# Altium PCB Controller_PCB.PcbDoc
Units mil, origin at the board's own origin, x right, y up, seen from the top; angles counter-clockwise.
Board outline 4500 x 2600 mil, 2 copper layers (Top Layer, Bottom Layer), stack 60.4 mil thick; 69 components, 76 nets, 1123 pads, 0 vias.
Unrouted connection lines stored in the file: 149.
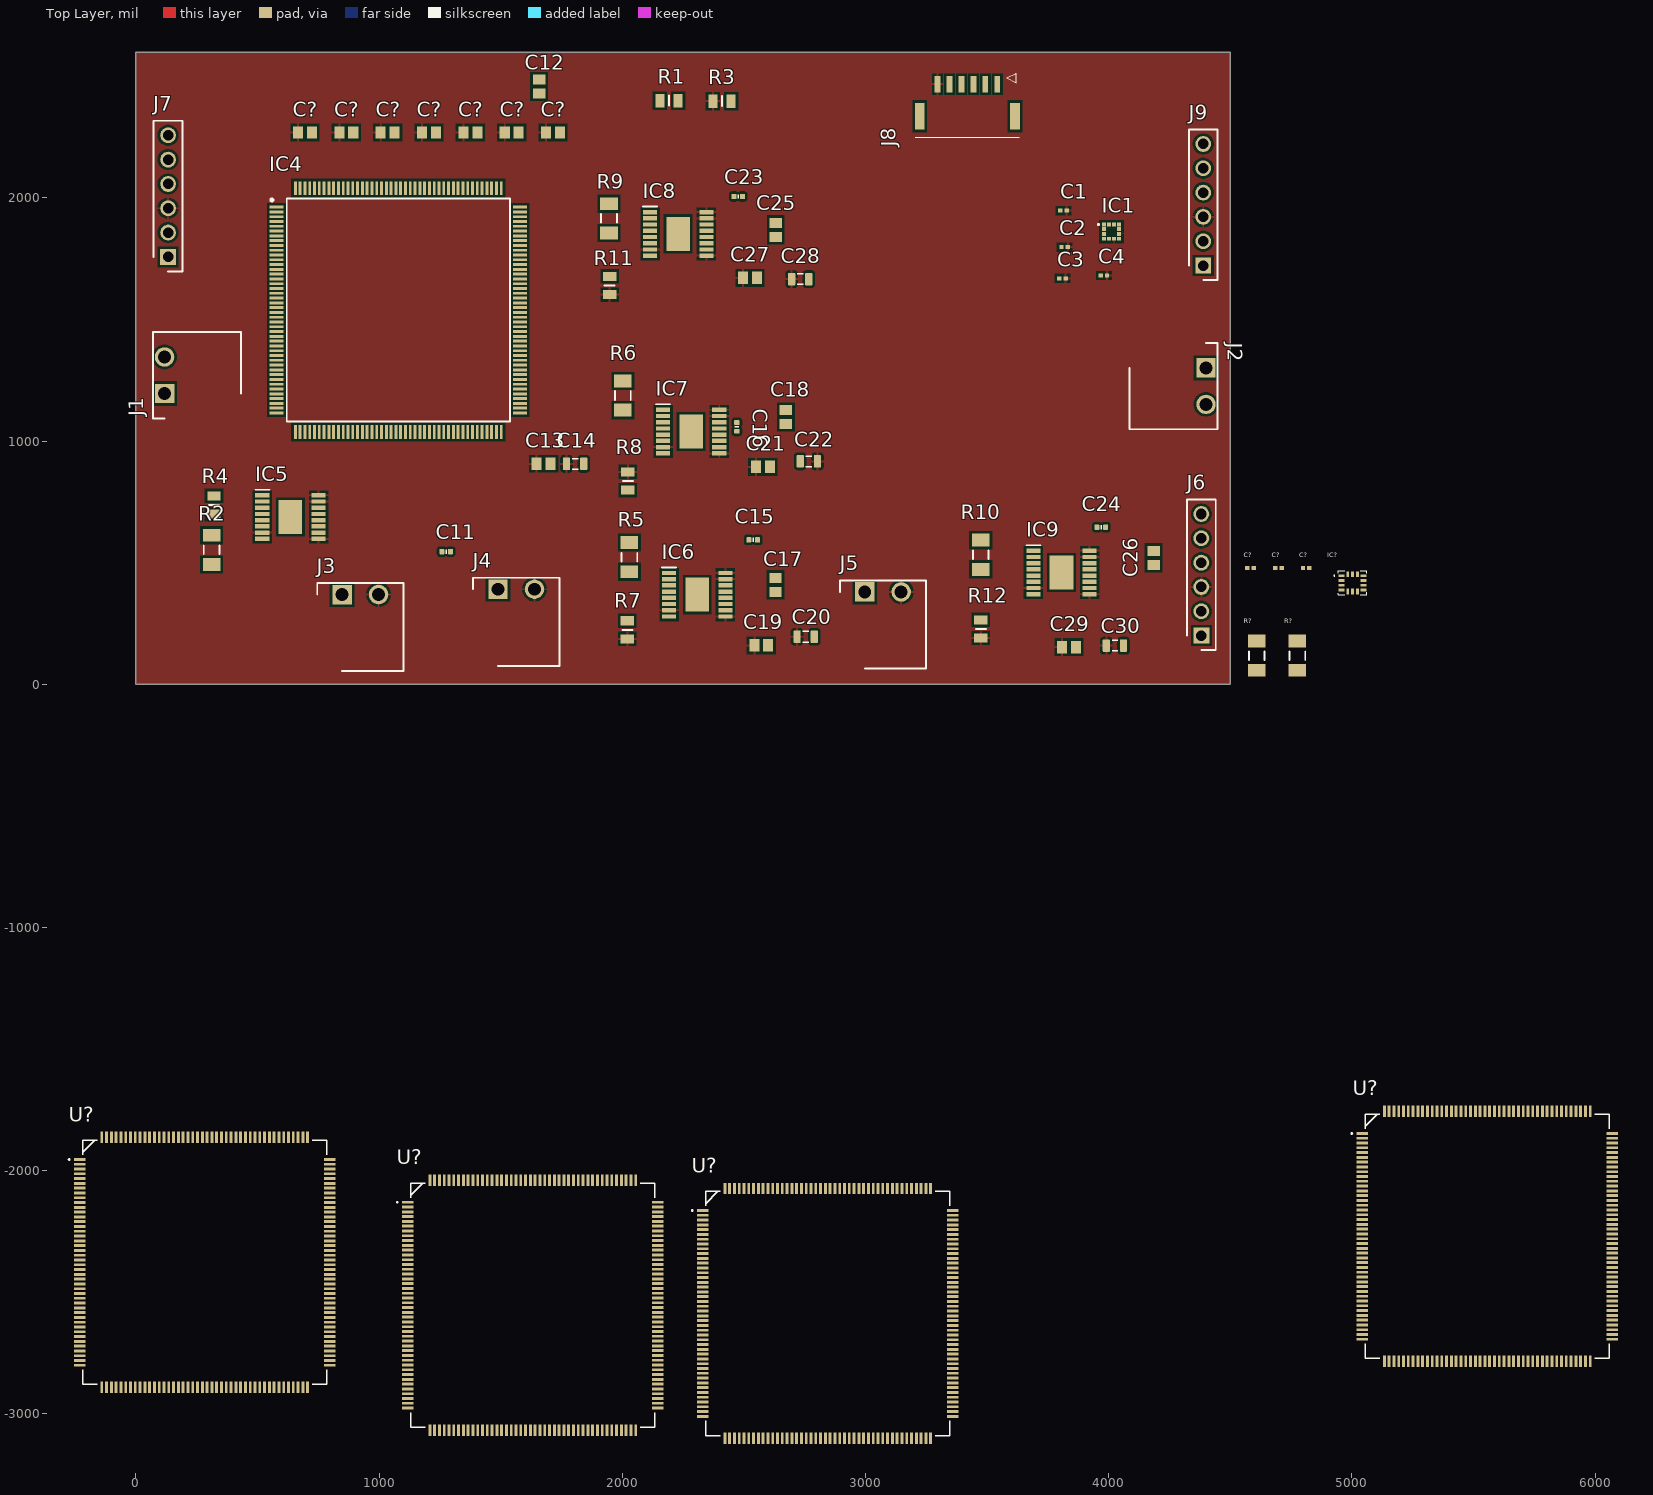
[diagram p0: Top Layer view]
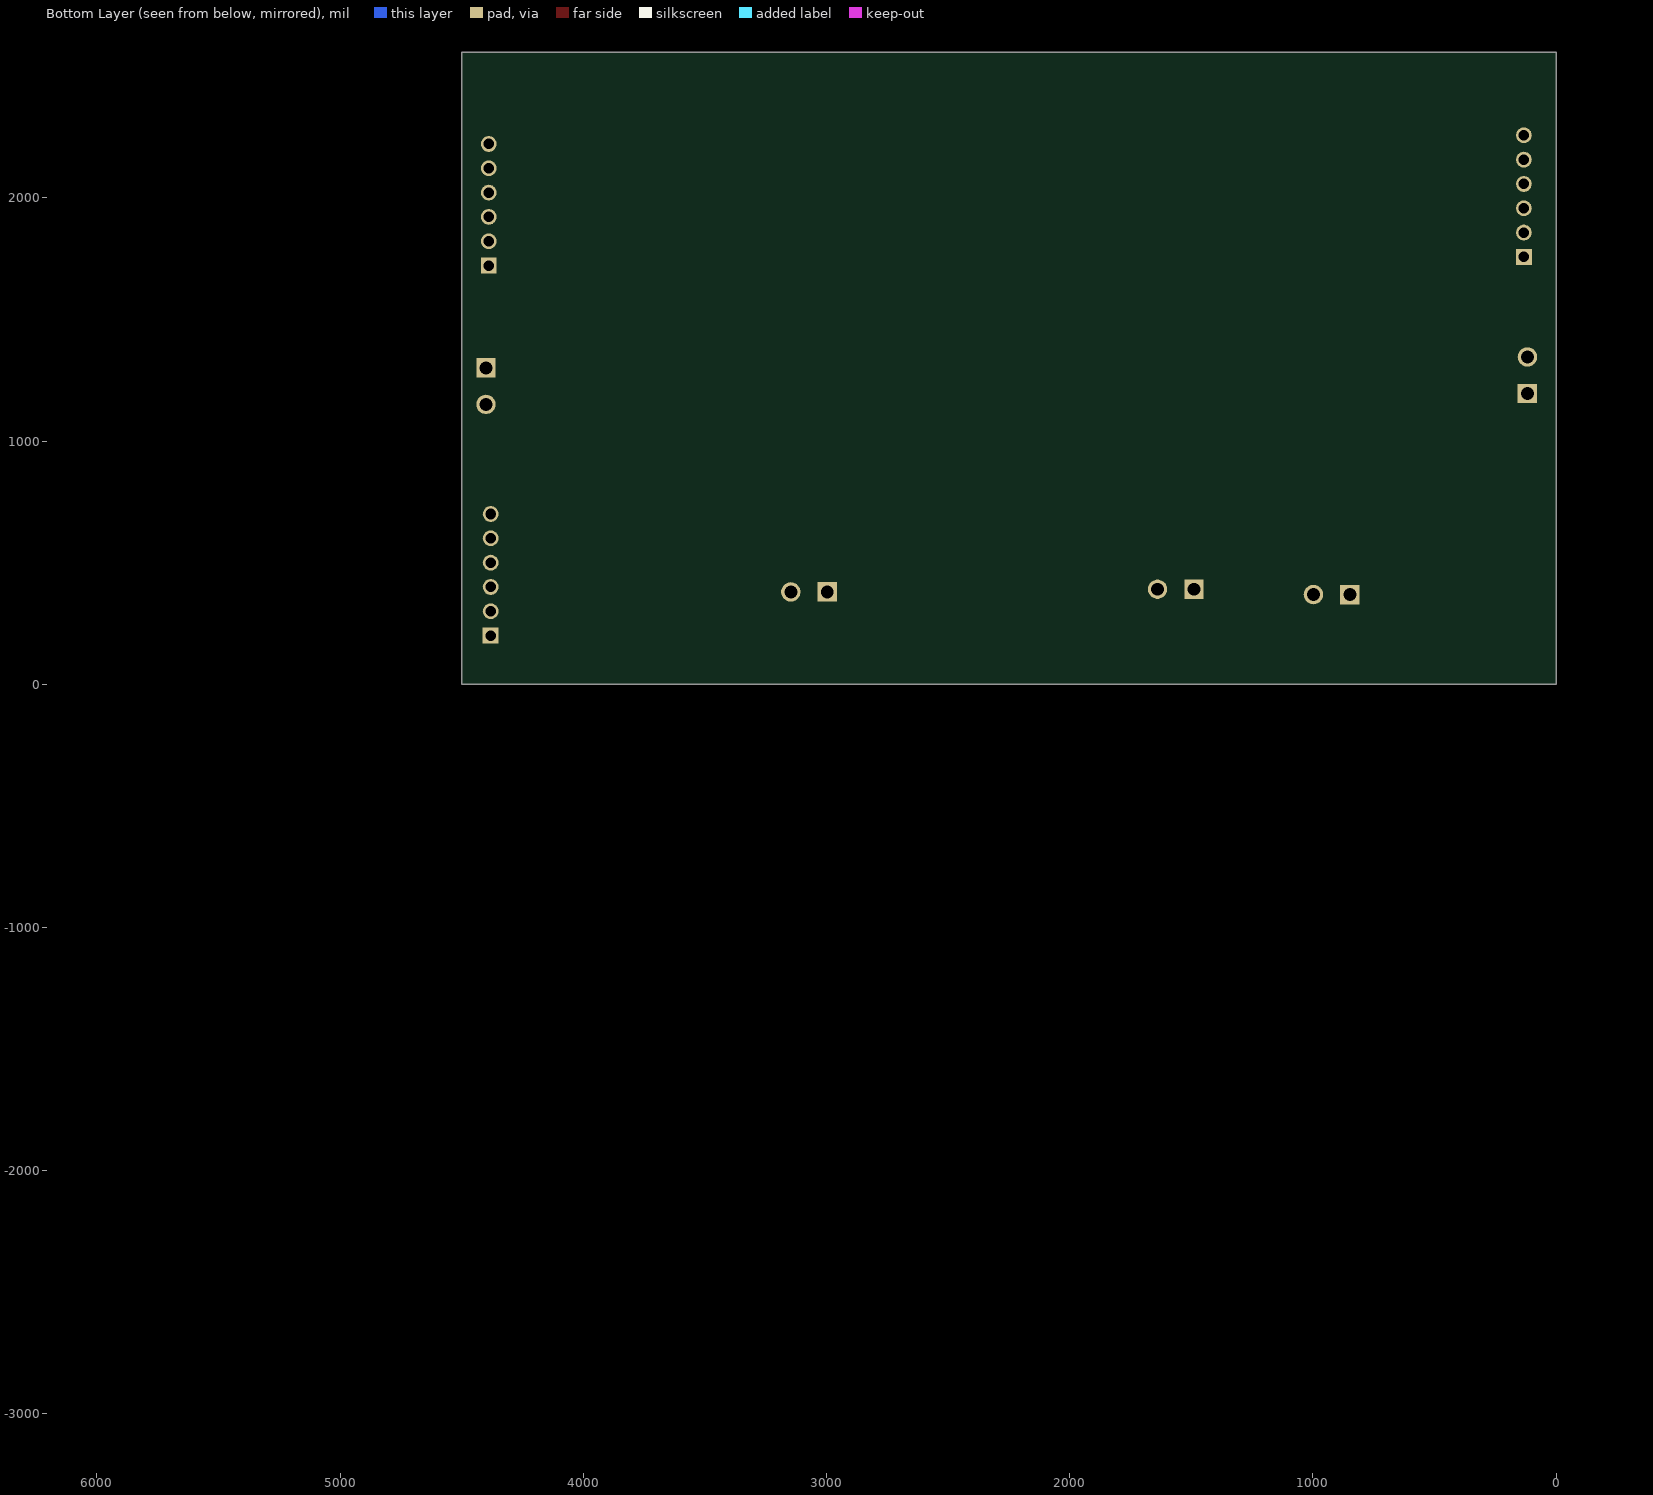
[diagram p1: Bottom Layer view, seen from below]

## Layer stack, top to bottom
Top Solder: solder mask 0.5, Solder Resist, Dk 3.3
Top Layer: signal copper 0.7
Dielectric1: core 59, FR-4, Dk 4.3
Bottom Layer: signal copper 0.7
Bottom Solder: solder mask 0.5, Solder Resist, Dk 3.3

## Board outline
0,0 4500,0 4500,2600 0,2600

## Design rules (kind name [scope] priority, off if disabled: settings)
Clearance [All] p1: gap=10 ignorepadtopadclearanceinfootprint=FALSE
HoleSize [All] p1: absolutevalues=TRUE maxlimit=300 minlimit=10 maxpercent=80.000 minpercent=20.000
MinimumAnnularRing [All] p1: minimumring=10
PasteMaskExpansion [All] p1: expansion=10
PlaneClearance [All] p1: clearance=15
PlaneConnect [All] p1: pad.planeconnectstyle=Relief pad.reliefexpansion=20 pad.reliefentries=4 pad.reliefconductorwidth=10 pad.reliefairgap=10 via.planeconnectstyle=Direct via.reliefexpansion=20 via.reliefentries=4 via.reliefconductorwidth=10 via.reliefairgap=10
PolygonConnect [All] p1: connectstyle=Relief reliefconductorwidth=10 reliefentries=4 polygonreliefangle="90 Angle" airgapwidth=10
RoomDefinition Controller [InComponentClass('Controller')] p1: confinementstyle=ConfineIn formatcopy=TRUE lockcomponents=FALSE outline 3165,1489.31 3296,1489.31 3296,1637.31 3165,1637.31
RoutingVias [All] p1: holewidth=28 width=50 viastyle="Through Hole" minholewidth=28 minwidth=50 maxholewidth=28 maxwidth=50
SMDNeckDown [All] p1: percent=100.000
SilkToSolderMaskClearance SilkscreenOverComponentPads [IsPad] p1: minsilkscreentomaskgap=10 clearancetoexposedcopper=TRUE
SolderMaskExpansion [All] p1: expansion=10 istentingtop=FALSE
SupplyNets "Schematic Supply Nets_7" [InNet('5V')] p1: voltage=0.000
SupplyNets "Schematic Supply Nets_6" [InNet('1V8')] p2: voltage=0.000
SupplyNets "Schematic Supply Nets_5" [InNet('VREF')] p3: voltage=0.000
SupplyNets "Schematic Supply Nets_4" [InNet('12V')] p4: voltage=0.000
SupplyNets "Schematic Supply Nets_3" [InNet('3V3')] p5: voltage=0.000
SupplyNets "Schematic Supply Nets_2" [InNet('1.8V')] p6: voltage=0.000
SupplyNets "Schematic Supply Nets_1" [InNet('GND')] p7: voltage=0.000
SupplyNets "Schematic Supply Nets" [InNet('3.3V')] p8: voltage=0.000
Width [All] p1: maxlimit=10 minlimit=10 preferedwidth=10
25 further rules are at their usual default settings.

## Classes and differential pairs
component class IMU_sensors: C1 C2 C3 C4 C? IC1 IC?
component class Motor_Drivers: C11 C12 C13 C14 C15 C16 C17 C18 C19 C20 C21 C22 C23 C24 C25 C26 C27 C28 C29 C30 IC5 IC6 IC7 IC8 IC9 R1 R2 R3 R4 R5 R6 R7 R8 R9 R10 R11 R12
component class connectors(temp): J1 J2 J3 J4 J5 J6 J7 J8 J9
component class Controller: C? IC4 R? U?

## Components (designator, comment, footprint, x,y, rotation, side; value= is the part's Value field where it differs from the comment)
C1 "02013A0R5CAT2A" CAPC0603X33N 3814.24,1947.99 r0 top
C2 "02013A0R5CAT2A" CAPC0603X33N 3819.24,1797.99 r0 top
C3 "02013A0R5CAT2A" CAPC0603X33N 3810.24,1668.99 r0 top
C4 "02013A0R5CAT2A" CAPC0603X33N 3980.24,1681.27 r0 top
C11 "Capacitor 22nF +/-20% 10V 0402" CAPC0402(1005)60_L 1275.95,545.53 r0 top value=22nF
C12 "Capacitor 100 nF +/-10% 50 V 0805" CAPC2013X95X50LL10T25 1658.11,2458.39 r270 top value=100nF
C13 "Capacitor 100 nF +/-10% 50 V 0805" CAPC2013X95X50LL10T25 1676.58,906.8 r0 top value=100nF
C14 "Capacitor 10µF +/-20% 25V 0805" CAPC0805(2012)145_L 1806.19,906.8 r0 top value=10µF
C15 "Capacitor 22nF +/-20% 10V 0402" CAPC0402(1005)60_L 2538.48,594 r0 top value=22nF
C16 "Capacitor 22nF +/-20% 10V 0402" CAPC0402(1005)60_L 2471.28,1058.51 r270 top value=22nF
C17 "Capacitor 100 nF +/-10% 50 V 0805" CAPC2013X95X50LL10T25 2630.04,408.87 r90 top value=100nF
C18 "Capacitor 100 nF +/-10% 50 V 0805" CAPC2013X95X50LL10T25 2672.88,1098.98 r90 top value=100nF
C19 "Capacitor 100 nF +/-10% 50 V 0805" CAPC2013X95X50LL10T25 2571.46,160 r0 top value=100nF
C20 "Capacitor 10µF +/-20% 25V 0805" CAPC0805(2012)145_L 2754.21,195.59 r0 top value=10µF
C21 "Capacitor 100 nF +/-10% 50 V 0805" CAPC2013X95X50LL10T25 2578.24,894.11 r0 top value=100nF
C22 "Capacitor 10µF +/-20% 25V 0805" CAPC0805(2012)145_L 2766.97,917.1 r180 top value=10µF
C23 "Capacitor 22nF +/-20% 10V 0402" CAPC0402(1005)60_L 2476.75,2005.84 r0 top value=22nF
C24 "Capacitor 22nF +/-20% 10V 0402" CAPC0402(1005)60_L 3969.77,645.98 r0 top value=22nF
C25 "Capacitor 100 nF +/-10% 50 V 0805" CAPC2013X95X50LL10T25 2631.39,1868.72 r90 top value=100nF
C26 "Capacitor 100 nF +/-10% 50 V 0805" CAPC2013X95X50LL10T25 4185,520 r90 top value=100nF
C27 "Capacitor 100 nF +/-10% 50 V 0805" CAPC2013X95X50LL10T25 2525.09,1671.2 r0 top value=100nF
C28 "Capacitor 10µF +/-20% 25V 0805" CAPC0805(2012)145_L 2731.93,1666.2 r0 top value=10µF
C29 "Capacitor 100 nF +/-10% 50 V 0805" CAPC2013X95X50LL10T25 3837,153 r0 top value=100nF
C30 "Capacitor 10µF +/-20% 25V 0805" CAPC0805(2012)145_L 4026,159 r0 top value=10µF
C? "02013A0R5CAT2A" CAPC0603X33N 4698,479 r0 top
C? "02013A0R5CAT2A" CAPC0603X33N 4812,479 r0 top
C? "02013A0R5CAT2A" CAPC0603X33N 4583,479 r0 top
C? "Capacitor 100 nF +/-10% 50 V 0805" CAPC2013X95X50LL10T25 1375.31,2269.16 r0 top value=100nF
C? "Capacitor 100 nF +/-10% 50 V 0805" CAPC2013X95X50LL10T25 865.31,2269.16 r0 top value=100nF
C? "Capacitor 100 nF +/-10% 50 V 0805" CAPC2013X95X50LL10T25 1205.31,2269.16 r0 top value=100nF
C? "Capacitor 100 nF +/-10% 50 V 0805" CAPC2013X95X50LL10T25 1715.31,2269.16 r0 top value=100nF
C? "Capacitor 100 nF +/-10% 50 V 0805" CAPC2013X95X50LL10T25 1035.31,2269.16 r0 top value=100nF
C? "Capacitor 100 nF +/-10% 50 V 0805" CAPC2013X95X50LL10T25 1545.31,2269.16 r0 top value=100nF
C? "Capacitor 100 nF +/-10% 50 V 0805" CAPC2013X95X50LL10T25 695.31,2269.16 r0 top value=100nF
IC1 "LSM303AGRTR" LGA-12 4011.74,1861.83 r0 top
IC4 "STM32H757IIT6" QFP50P2600X2600X160-176N 1079,1539 r0 top
IC5 "DRV8874PWPR" SOP65P640X120-17N 635.43,687.83 r0 top
IC6 "DRV8874PWPR" SOP65P640X120-17N 2308.47,368.44 r0 top
IC7 "DRV8874PWPR" SOP65P640X120-17N 2283.22,1039.36 r0 top
IC8 "DRV8874PWPR" SOP65P640X120-17N 2230,1852.14 r0 top
IC9 "DRV8874PWPR" SOP65P640X120-17N 3806.2,459.79 r0 top
IC? "ICM-42670-P" ICM42670P 5003,417 r0 top
J1 "5444262" SHDR2W80P0X381_1X2_901X920X740P 118,1196 r90 top
J2 "5444262" SHDR2W80P0X381_1X2_901X920X740P 4400.48,1301.14 r270 top
J3 "5444262" SHDR2W80P0X381_1X2_901X920X740P 848,369 r0 top
J4 "5444262" SHDR2W80P0X381_1X2_901X920X740P 1489,391 r0 top
J5 "5444262" SHDR2W80P0X381_1X2_901X920X740P 2997,379.9 r0 top
J6 "PH1-06-UA" HDRV6W64P0X254_1X6_1524X250X952P 4381.23,200.31 r90 top
J7 "PH1-06-UA" HDRV6W64P0X254_1X6_1524X250X952P 132.41,1757.56 r90 top
J8 "5023820670" 5023820670 3419.18,2468 r180 top
J9 "PH1-06-UA" HDRV6W64P0X254_1X6_1524X250X952P 4389,1722 r90 top
R1 "RC0805FR-0716KL" RESC2012X60N 2192.19,2400.03 r0 top
R2 "Resistor 10k +/-1% 1206 250 mW" RESC3216X60X45ML15T20 311.41,552.82 r90 top value=10k
R3 "RC0805FR-0751KL" RESC2012X60N 2409.94,2397.98 r0 top
R4 "RC0805FR-075K49L" RESC2012X60N 321.29,737.63 r270 top
R5 "Resistor 10k +/-1% 1206 250 mW" RESC3216X60X45ML15T20 2028.97,523.05 r90 top value=10k
R6 "Resistor 10k +/-1% 1206 250 mW" RESC3216X60X45ML15T20 2002.25,1187.57 r270 top value=10k
R7 "RC0805FR-075K49L" RESC2012X60N 2020.78,224.13 r270 top
R8 "RC0805FR-075K49L" RESC2012X60N 2022.92,835.78 r90 top
R9 "Resistor 10k +/-1% 1206 250 mW" RESC3216X60X45ML15T20 1945.17,1916.12 r270 top value=10k
R10 "Resistor 10k +/-1% 1206 250 mW" RESC3216X60X45ML15T20 3474.2,532.62 r270 top value=10k
R11 "RC0805FR-075K49L" RESC2012X60N 1948.33,1639.7 r270 top
R12 "RC0805FR-075K49L" RESC2012X60N 3474.2,227.79 r270 top
R? "Resistor 10k +/-1% 1206 250 mW" RESC3216X60X45ML15T20 4776,118 r90 top value=10k
R? "Resistor 10k +/-1% 1206 250 mW" RESC3216X60X45ML15T20 4609,118 r90 top value=10k
U? "STM32H757IIT6" LQFP-176 5557,-2270 r0 top
U? "STM32H757IIT6" LQFP-176 283,-2377 r0 top
U? "STM32H757IIT6" LQFP-176 2845,-2587 r0 top
U? "STM32H757IIT6" LQFP-176 1632,-2553 r0 top

## Footprints (in the part's own frame and the unit in brackets; to place one, negate y for a bottom-side part, rotate by r counter-clockwise, add the part's x,y. Pads: shape width x height; smd on the part's side, far side on the other; paste and mask are expansions set on the pad)
5023820670 [mm]
  rect 0.6x1.7 smd: 1(-3.125,0) 2(-1.875,0) 3(-0.625,0) 4(0.625,0) 5(1.875,0) 6(3.125,0)
  rect 1x2.8 smd: 7(-4.975,3.35) 8(4.975,3.35)
  silkscreen extent -5.43,-1.15 5.43,5.53, body extent -5.43,-3.22 5.43,2.73, height 2.2
CAPC0402(1005)60_L [mm] "Chip Capacitor, Body 1.0x0.5mm, Height 0.6mm, IPC High Density"
  rrect25% 0.5x0.55 smd: 1(-0.45,0) 2(0.45,0)
  silkscreen extent 0,-0.2 0,0.2, body extent -0.5,-0.25 0.5,0.25, height 0.6
CAPC0603X33N [mm]
  rect 0.46x0.42 smd: 1(-0.33,0) 2(0.33,0)
  body extent -0.3,-0.15 0.3,0.15, height 0.33
CAPC0805(2012)145_L [mm] "Chip Capacitor, Body 2.0x1.2mm, Height 1.45mm, IPC High Density"
  rrect25% 0.76x1.3 smd: 1(-0.9,0) 2(0.89,0)
  silkscreen extent -0.3,-0.55 0.3,0.55, body extent -1,-0.6 1,0.6, height 1.45
CAPC2013X95X50LL10T25 [mm] "Chip Capacitor, 2-Leads, Body 2.10x1.35mm, IPC High Density"
  rect 1.05x1.3 smd: 1(-0.725,0) 2(0.725,0)
  body extent -1.05,-0.67 1.05,0.67, height 0.95
HDRV6W64P0X254_1X6_1524X250X952P [mm]
  rect 1.65x1.65 hole 1.1: 1(0,0)
  round 1.65 hole 1.1: 2(2.54,0) 3(5.08,0) 4(7.62,0) 5(10.16,0) 6(12.7,0)
  silkscreen extent -1.52,-1.5 14.22,1.5, body extent -1.27,-1.25 13.97,1.25, height 9.52
ICM42670P [mm]
  rect 0.6x0.3 smd: 1(-1.15,0.75) 2(-1.15,0.25) 3(-1.15,-0.25) 4(-1.15,-0.75) 8(1.15,-0.75) 9(1.15,-0.25) 10(1.15,0.25) 11(1.15,0.75)
  rect 0.3x0.6 smd: 5(-0.5,-0.9) 6(0,-0.9) 7(0.5,-0.9) 12(0.5,0.9) 13(0,0.9) 14(-0.5,0.9)
  silkscreen extent -1.95,-1.25 1.5,1.25, body extent -1.5,-1.25 1.5,1.25, height 0.65
LGA-12 [mm]
  rect 0.4x0.4 smd: 1(-0.8,0.75) 2(-0.8,0.25) 3(-0.8,-0.25) 4(-0.8,-0.75) 5(-0.25,-0.75) 6(0.25,-0.75) 7(0.8,-0.75) 8(0.8,-0.25) 9(0.8,0.25) 10(0.8,0.75) 11(0.25,0.75) 12(-0.25,0.75)
  silkscreen extent -1.39,0.72 -1.34,0.77, body extent -1,-1 1,1, height 1
LQFP-176 [mm]
  rect 1.2x0.3 smd paste-0.6 mask-0.597: 1(-13.05,10.75) 2(-13.05,10.25) 3(-13.05,9.75) 4(-13.05,9.25) 5(-13.05,8.75) 6(-13.05,8.25) 7(-13.05,7.75) 8(-13.05,7.25) 9(-13.05,6.75) 10(-13.05,6.25) 11(-13.05,5.75) 12(-13.05,5.25) 13(-13.05,4.75) 14(-13.05,4.25) 15(-13.05,3.75) 16(-13.05,3.25) 17(-13.05,2.75) 18(-13.05,2.25) 19(-13.05,1.75) 20(-13.05,1.25) 21(-13.05,0.75) 22(-13.05,0.25) 23(-13.05,-0.25) 24(-13.05,-0.75) 25(-13.05,-1.25) 26(-13.05,-1.75) 27(-13.05,-2.25) 28(-13.05,-2.75) 29(-13.05,-3.25) 30(-13.05,-3.75) 31(-13.05,-4.25) 32(-13.05,-4.75) 33(-13.05,-5.25) 34(-13.05,-5.75) 35(-13.05,-6.25) 36(-13.05,-6.75) 37(-13.05,-7.25) 38(-13.05,-7.75) 39(-13.05,-8.25) 40(-13.05,-8.75) 41(-13.05,-9.25) 42(-13.05,-9.75) 43(-13.05,-10.25) 44(-13.05,-10.75) 89(13.05,-10.75) 90(13.05,-10.25) 91(13.05,-9.75) 92(13.05,-9.25) 93(13.05,-8.75) 94(13.05,-8.25) 95(13.05,-7.75) 96(13.05,-7.25) 97(13.05,-6.75) 98(13.05,-6.25) 99(13.05,-5.75) 100(13.05,-5.25) 101(13.05,-4.75) 102(13.05,-4.25) 103(13.05,-3.75) 104(13.05,-3.25) 105(13.05,-2.75) 106(13.05,-2.25) 107(13.05,-1.75) 108(13.05,-1.25) 109(13.05,-0.75) 110(13.05,-0.25) 111(13.05,0.25) 112(13.05,0.75) 113(13.05,1.25) 114(13.05,1.75) 115(13.05,2.25) 116(13.05,2.75) 117(13.05,3.25) 118(13.05,3.75) 119(13.05,4.25) 120(13.05,4.75) 121(13.05,5.25) 122(13.05,5.75) 123(13.05,6.25) 124(13.05,6.75) 125(13.05,7.25) 126(13.05,7.75) 127(13.05,8.25) 128(13.05,8.75) 129(13.05,9.25) 130(13.05,9.75) 131(13.05,10.25) 132(13.05,10.75)
  rect 0.3x1.2 smd paste-0.6 mask-0.597: 45(-10.75,-13.05) 46(-10.25,-13.05) 47(-9.75,-13.05) 48(-9.25,-13.05) 49(-8.75,-13.05) 50(-8.25,-13.05) 51(-7.75,-13.05) 52(-7.25,-13.05) 53(-6.75,-13.05) 54(-6.25,-13.05) 55(-5.75,-13.05) 56(-5.25,-13.05) 57(-4.75,-13.05) 58(-4.25,-13.05) 59(-3.75,-13.05) 60(-3.25,-13.05) 61(-2.75,-13.05) 62(-2.25,-13.05) 63(-1.75,-13.05) 64(-1.25,-13.05) 65(-0.75,-13.05) 66(-0.25,-13.05) 67(0.25,-13.05) 68(0.75,-13.05) 69(1.25,-13.05) 70(1.75,-13.05) 71(2.25,-13.05) 72(2.75,-13.05) 73(3.25,-13.05) 74(3.75,-13.05) 75(4.25,-13.05) 76(4.75,-13.05) 77(5.25,-13.05) 78(5.75,-13.05) 79(6.25,-13.05) 80(6.75,-13.05) 81(7.25,-13.05) 82(7.75,-13.05) 83(8.25,-13.05) 84(8.75,-13.05) 85(9.25,-13.05) 86(9.75,-13.05) 87(10.25,-13.05) 88(10.75,-13.05) 133(10.75,13.05) 134(10.25,13.05) 135(9.75,13.05) 136(9.25,13.05) 137(8.75,13.05) 138(8.25,13.05) 139(7.75,13.05) 140(7.25,13.05) 141(6.75,13.05) 142(6.25,13.05) 143(5.75,13.05) 144(5.25,13.05) 145(4.75,13.05) 146(4.25,13.05) 147(3.75,13.05) 148(3.25,13.05) 149(2.75,13.05) 150(2.25,13.05) 151(1.75,13.05) 152(1.25,13.05) 153(0.75,13.05) 154(0.25,13.05) 155(-0.25,13.05) 156(-0.75,13.05) 157(-1.25,13.05) 158(-1.75,13.05) 159(-2.25,13.05) 160(-2.75,13.05) 161(-3.25,13.05) 162(-3.75,13.05) 163(-4.25,13.05) 164(-4.75,13.05) 165(-5.25,13.05) 166(-5.75,13.05) 167(-6.25,13.05) 168(-6.75,13.05) 169(-7.25,13.05) 170(-7.75,13.05) 171(-8.25,13.05) 172(-8.75,13.05) 173(-9.25,13.05) 174(-9.75,13.05) 175(-10.25,13.05) 176(-10.75,13.05)
  silkscreen extent -14.23,-12.75 12.75,12.75, body extent -13.3,-13.3 13.3,13.3, height 1.65
QFP50P2600X2600X160-176N [mm]
  rect 1.45x0.3 smd: 1(-12.725,10.75) 2(-12.725,10.25) 3(-12.725,9.75) 4(-12.725,9.25) 5(-12.725,8.75) 6(-12.725,8.25) 7(-12.725,7.75) 8(-12.725,7.25) 9(-12.725,6.75) 10(-12.725,6.25) 11(-12.725,5.75) 12(-12.725,5.25) 13(-12.725,4.75) 14(-12.725,4.25) 15(-12.725,3.75) 16(-12.725,3.25) 17(-12.725,2.75) 18(-12.725,2.25) 19(-12.725,1.75) 20(-12.725,1.25) 21(-12.725,0.75) 22(-12.725,0.25) 23(-12.725,-0.25) 24(-12.725,-0.75) 25(-12.725,-1.25) 26(-12.725,-1.75) 27(-12.725,-2.25) 28(-12.725,-2.75) 29(-12.725,-3.25) 30(-12.725,-3.75) 31(-12.725,-4.25) 32(-12.725,-4.75) 33(-12.725,-5.25) 34(-12.725,-5.75) 35(-12.725,-6.25) 36(-12.725,-6.75) 37(-12.725,-7.25) 38(-12.725,-7.75) 39(-12.725,-8.25) 40(-12.725,-8.75) 41(-12.725,-9.25) 42(-12.725,-9.75) 43(-12.725,-10.25) 44(-12.725,-10.75) 89(12.725,-10.75) 90(12.725,-10.25) 91(12.725,-9.75) 92(12.725,-9.25) 93(12.725,-8.75) 94(12.725,-8.25) 95(12.725,-7.75) 96(12.725,-7.25) 97(12.725,-6.75) 98(12.725,-6.25) 99(12.725,-5.75) 100(12.725,-5.25) 101(12.725,-4.75) 102(12.725,-4.25) 103(12.725,-3.75) 104(12.725,-3.25) 105(12.725,-2.75) 106(12.725,-2.25) 107(12.725,-1.75) 108(12.725,-1.25) 109(12.725,-0.75) 110(12.725,-0.25) 111(12.725,0.25) 112(12.725,0.75) 113(12.725,1.25) 114(12.725,1.75) 115(12.725,2.25) 116(12.725,2.75) 117(12.725,3.25) 118(12.725,3.75) 119(12.725,4.25) 120(12.725,4.75) 121(12.725,5.25) 122(12.725,5.75) 123(12.725,6.25) 124(12.725,6.75) 125(12.725,7.25) 126(12.725,7.75) 127(12.725,8.25) 128(12.725,8.75) 129(12.725,9.25) 130(12.725,9.75) 131(12.725,10.25) 132(12.725,10.75)
  rect 0.3x1.45 smd: 45(-10.75,-12.725) 46(-10.25,-12.725) 47(-9.75,-12.725) 48(-9.25,-12.725) 49(-8.75,-12.725) 50(-8.25,-12.725) 51(-7.75,-12.725) 52(-7.25,-12.725) 53(-6.75,-12.725) 54(-6.25,-12.725) 55(-5.75,-12.725) 56(-5.25,-12.725) 57(-4.75,-12.725) 58(-4.25,-12.725) 59(-3.75,-12.725) 60(-3.25,-12.725) 61(-2.75,-12.725) 62(-2.25,-12.725) 63(-1.75,-12.725) 64(-1.25,-12.725) 65(-0.75,-12.725) 66(-0.25,-12.725) 67(0.25,-12.725) 68(0.75,-12.725) 69(1.25,-12.725) 70(1.75,-12.725) 71(2.25,-12.725) 72(2.75,-12.725) 73(3.25,-12.725) 74(3.75,-12.725) 75(4.25,-12.725) 76(4.75,-12.725) 77(5.25,-12.725) 78(5.75,-12.725) 79(6.25,-12.725) 80(6.75,-12.725) 81(7.25,-12.725) 82(7.75,-12.725) 83(8.25,-12.725) 84(8.75,-12.725) 85(9.25,-12.725) 86(9.75,-12.725) 87(10.25,-12.725) 88(10.75,-12.725) 133(10.75,12.725) 134(10.25,12.725) 135(9.75,12.725) 136(9.25,12.725) 137(8.75,12.725) 138(8.25,12.725) 139(7.75,12.725) 140(7.25,12.725) 141(6.75,12.725) 142(6.25,12.725) 143(5.75,12.725) 144(5.25,12.725) 145(4.75,12.725) 146(4.25,12.725) 147(3.75,12.725) 148(3.25,12.725) 149(2.75,12.725) 150(2.25,12.725) 151(1.75,12.725) 152(1.25,12.725) 153(0.75,12.725) 154(0.25,12.725) 155(-0.25,12.725) 156(-0.75,12.725) 157(-1.25,12.725) 158(-1.75,12.725) 159(-2.25,12.725) 160(-2.75,12.725) 161(-3.25,12.725) 162(-3.75,12.725) 163(-4.25,12.725) 164(-4.75,12.725) 165(-5.25,12.725) 166(-5.75,12.725) 167(-6.25,12.725) 168(-6.75,12.725) 169(-7.25,12.725) 170(-7.75,12.725) 171(-8.25,12.725) 172(-8.75,12.725) 173(-9.25,12.725) 174(-9.75,12.725) 175(-10.25,12.725) 176(-10.75,12.725)
  silkscreen extent -13.32,-11.65 11.65,11.65, body extent -13,-13 13,13, height 1.6
RESC2012X60N [mm]
  rect 0.95x1.4 smd: 1(-0.95,0) 2(0.95,0)
  silkscreen extent 0,-0.53 0,0.53, body extent -1,-0.63 1,0.63, height 0.6
RESC3216X60X45ML15T20 [mm] "Chip Resistor, 2-Leads, Body 3.3x1.75mm, IPC Low Density"
  rect 1.35x1.85 smd: 1(-1.525,0) 2(1.525,0)
  silkscreen extent -0.45,-0.82 0.45,0.82, body extent -1.65,-0.87 1.65,0.87, height 0.6
SHDR2W80P0X381_1X2_901X920X740P [mm]
  rect 2.025x2.025 hole 1.35: 1(0,0)
  round 2.025 hole 1.35: 2(3.81,0)
  silkscreen extent -2.6,-8 6.41,1.2, body extent -2.71,-8.15 6.52,1.35, height 7.6
SOP65P640X120-17N [mm]
  rect 1.475x0.45 smd: 1(-2.938,2.275) 2(-2.938,1.625) 3(-2.938,0.975) 4(-2.938,0.325) 5(-2.938,-0.325) 6(-2.938,-0.975) 7(-2.938,-1.625) 8(-2.938,-2.275) 9(2.938,-2.275) 10(2.938,-1.625) 11(2.938,-0.975) 12(2.938,-0.325) 13(2.938,0.325) 14(2.938,0.975) 15(2.938,1.625) 16(2.938,2.275)
  rect 2.46x3.55 smd: 17(0,0)
  silkscreen extent -3.67,2.85 -2.2,2.85, body extent -3.2,-2.5 3.2,2.5, height 1.13

## Part data
C1 C2 C3 C4 C? C? C?: "Capacitor", Manufacturer_Name=AVX, Mouser Part Number=581-02013A0R5C, Arrow Part Number=02013A0R5CAT2A, Arrow Price/Stock=https://www.arrow.com/en/products/02013a0r5cat2a/avx, Datasheet Link=http://www.mouser.com/catalog/supplier/library/pdf/AVXSurfaceMountCeramic.pdf, Height=0.33mm, Manufacturer_Part_Number=02013A0R5CAT2A, Mouser Price/Stock=https://www.mouser.co.uk/ProductDetail/AVX/02013A0R5CAT2A?qs=Thry1QCnmXB3nXCuXCgVMw%3D%3D
C11 C15 C16 C23 C24: library part CMP-001-00062-3, "Chip Capacitor, 22nF +/-20%, 10V, 0402, Thickness 0.6 mm", Case/Package=0402, Max Operating Temperature=85°C, Min Operating Temperature=-55°C, Tolerance=10%, Voltage Rating=10V, Mounting Technology=SMT, Pins=2
C12 C13 C17 C18 C19 C21 C25 C26 C27 C29 C? C? C? C? C? C? C?: library part CMP-001-00018-6, "Chip Capacitor, 100 nF, +/- 10%, 50 V, 0805 (2012 Metric)", Capacitor Type=Ceramic, Case/Package=0805, Max Operating Temperature=125°C, Min Operating Temperature=-55°C, Tolerance=10%, Voltage Rating=50V, Mounting Technology=SM, Pins=2, RoHS Compliant=True
C14 C20 C22 C28 C30: library part CMP-001-00079-4, "Chip Capacitor, 10µF +/-20%, 25V, 0805, Thickness 1.45 mm", Case/Package=0805, Max Operating Temperature=85°C, Min Operating Temperature=-55°C, Tolerance=10%, Voltage Rating=25V, Mounting Technology=SMT, Pins=2
IC1: "Integrated Circuit", Manufacturer_Name=STMicroelectronics, Mouser Part Number=511-LSM303AGRTR, Arrow Part Number=LSM303AGRTR, Arrow Price/Stock=https://www.arrow.com/en/products/lsm303agrtr/stmicroelectronics?region=nac, Datasheet Link=http://www.st.com/content/ccc/resource/technical/document/datasheet/74/c4/19/54/62/c5/46/13/DM00177685.pdf/files/DM00177685.pdf/jcr:content/translations/en.DM00177685.pdf, Manufacturer_Part_Number=LSM303AGRTR, Mouser Price/Stock=https://www.mouser.co.uk/ProductDetail/STMicroelectronics/LSM303AGRTR?qs=dTJS0cRn7oj2TlQhcroMCw%3D%3D
IC4: "Integrated Circuit", Manufacturer_Name=STMicroelectronics, Mouser Part Number=511-STM32H757IIT6, Arrow Part Number=STM32H757IIT6, Arrow Price/Stock=https://www.arrow.com/en/products/stm32h757iit6/stmicroelectronics?region=nac, Datasheet Link=https://www.st.com/resource/en/datasheet/stm32h757ai.pdf, Height=1.6mm, Manufacturer_Part_Number=STM32H757IIT6, Mouser Price/Stock=https://www.mouser.co.uk/ProductDetail/STMicroelectronics/STM32H757IIT6?qs=vLWxofP3U2wz9EzH5pjPxQ%3D%3D
IC5 IC6 IC7 IC8 IC9: "Integrated Circuit", Manufacturer_Name="Texas Instruments", Mouser Part Number=595-DRV8874PWPR, Arrow Part Number=DRV8874PWPR, Arrow Price/Stock=https://www.arrow.com/en/products/drv8874pwpr/texas-instruments?region=europe, Datasheet Link=https://www.ti.com/lit/gpn/DRV8874, Height=1.2mm, Manufacturer_Part_Number=DRV8874PWPR, Mouser Price/Stock=https://www.mouser.co.uk/ProductDetail/Texas-Instruments/DRV8874PWPR?qs=mAH9sUMRCtvh%2FSU15ywmDA%3D%3D
IC?: "Integrated Circuit", Manufacturer_Name=TDK, Mouser Part Number=410-ICM-42670-P, Arrow Part Number=ICM-42670-P, Arrow Price/Stock=https://www.arrow.com/en/products/icm-42670-p/invensense?region=nac, Datasheet Link=https://3cfeqx1hf82y3xcoull08ihx-wpengine.netdna-ssl.com/wp-content/uploads/2021/07/DS-000451-ICM-42670-P-v1.0.pdf, Manufacturer_Part_Number=ICM-42670-P, Mouser Price/Stock=https://www.mouser.co.uk/ProductDetail/TDK-InvenSense/ICM-42670-P?qs=iLbezkQI%252BsgK8sMF5V7fQQ%3D%3D
J1 J2 J3 J4 J5: "Connector", Manufacturer_Name="Phoenix Contact", Mouser Part Number=651-5444262, Arrow Part Number=5444262, Arrow Price/Stock=https://www.arrow.com/en/products/5444262/phoenix-contact?region=nac, Datasheet Link=https://datasheet.datasheetarchive.com/originals/distributors/Datasheets-DGA25/1829481.pdf, Height=7.4mm, Manufacturer_Part_Number=5444262, Mouser Price/Stock=https://www.mouser.co.uk/ProductDetail/Phoenix-Contact/5444262?qs=9Y9qB%2FCsC3lS%2FxAVKTDcmQ%3D%3D
J6 J7 J9: "Connector", Manufacturer_Name="Adam Tech", Arrow Part Number=PH1-06-UA, Arrow Price/Stock=https://www.arrow.com/en/products/ph1-06-ua/adam-tech?region=nac, Datasheet Link=https://datasheet.datasheetarchive.com/originals/distributors/Datasheets_SAMA/22522227e000bb8d8f26a3580c1bb98b.pdf, Height=9.516mm, Manufacturer_Part_Number=PH1-06-UA
J8: "Connector", Manufacturer_Name=Molex, Arrow Part Number=5023820670, Arrow Price/Stock=https://www.arrow.com/en/products/502382-0670/molex, Datasheet Link=https://www.molex.com/pdm_docs/sd/5023820870_sd.pdf, Height=4.55mm, Manufacturer_Part_Number=5023820670
R1: "Resistor", Manufacturer_Name=YAGEO, Datasheet Link=https://www.yageo.com/upload/media/product/productsearch/datasheet/rchip/PYu-RC_Group_51_RoHS_L_11.pdf, Height=0.6mm, Manufacturer_Part_Number=RC0805FR-0716KL
R2 R5 R6 R9 R10 R? R?: library part CMP-009-00016-5, "Chip Resistor, 10 KOhm, +/- 1%, 0.25 W, -55 to 155 degC, 1206 (3216 Metric)", Case/Package=1206, Max Operating Temperature=155°C, Min Operating Temperature=-55°C, Power=250mW, Tolerance=1%, Voltage Rating=200V, Mounting Technology=SM, Pins=2, RoHS Compliant=True
R3: "Resistor", Manufacturer_Name=KEMET, Mouser Part Number=603-RC0805FR-0751KL, Datasheet Link=http://www.yageo.com/documents/recent/PYu-RC_Group_51_RoHS_L_10.pdf, Height=0.6mm, Manufacturer_Part_Number=RC0805FR-0751KL, Mouser Price/Stock=https://www.mouser.com/Search/Refine.aspx?Keyword=603-RC0805FR-0751KL
R4 R7 R8 R11 R12: "Resistor", Manufacturer_Name=KEMET, Mouser Part Number=603-RC0805FR-075K49L, Arrow Part Number=RC0805FR-075K49L, Arrow Price/Stock=https://www.arrow.com/en/products/rc0805fr-075k49l/yageo, Datasheet Link=http://www.yageo.com/documents/recent/PYu-RC_Group_51_RoHS_L_10.pdf, Height=0.6mm, Manufacturer_Part_Number=RC0805FR-075K49L, Mouser Price/Stock=https://www.mouser.co.uk/ProductDetail/Yageo/RC0805FR-075K49L?qs=VLOqbHBAO5cAd3YpTUoSOQ%3D%3D
U? U? U? U?: "No Description Available", Mfr_Name=STMicroelectronics, RefDes=RefDes, Type=Type
  U?: ComponentLink1Description="Datasheet Link", ComponentLink1URL=https://www.st.com/resource/en/datasheet/stm32h757ai.pdf

## Nets (pads, with @x,y where several pads share a name; then routed paths per layer and width w, separated by ;. In a path a pad name is that pad's centre, name@x,y a point inside that pad or via, vN(x,y) a via of type N, cw(c..) or ccw(c..) an arc to the next point about the centre after c; other vN are vias at no path point)
1.8V: C?.1@4570.01,479 C?.1@4685.01,479 C?.1@4799.01,479 IC?.5 IC?.8
1V8: J5.1
3.3V: C1.1 C2.1 C3.1 IC1.9 IC1.10 R1.2 R2.2 R5.2 R6.2 R9.2 R10.2
3V3: J4.1
5V: C?.2@723.85,2269.16 C?.2@893.85,2269.16 C?.2@1063.85,2269.16 C?.2@1233.85,2269.16 C?.2@1403.85,2269.16 C?.2@1573.85,2269.16 J3.1 J6.4 J7.4 J8.1 J9.4 U?.7@-230.78,-2071.88 U?.8@-230.78,-2091.57 U?.13@-230.78,-2189.99 U?.25@-230.78,-2426.21 U?.44@-230.78,-2800.23 U?.48@-81.17,-2890.78 U?.65@253.47,-2890.78 U?.71@371.58,-2890.78 U?.84@627.49,-2890.78 U?.92@796.78,-2741.17 U?.99@796.78,-2603.38 U?.113@796.78,-2327.79 U?.126@796.78,-2071.88 U?.136@647.17,-1863.22 U?.152@332.21,-1863.22
12V: C12.1 C13.2 C14.2 C17.1 C18.1 C19.2 C20.2 C21.2 C22.2 C25.1 C26.1 C27.2 C28.2 C29.2 C30.2 IC5.11 IC6.11 IC7.11 IC8.11 IC9.11
GND: C1.2 C2.2 C3.2 C4.2 C13.1 C14.1 C19.1 C20.1 C21.1 C22.1 C27.1 C28.1 C29.1 C30.1 C?.1@666.76,2269.16 C?.1@836.76,2269.16 C?.1@1006.76,2269.16 C?.1@1176.76,2269.16 C?.1@1346.76,2269.16 C?.1@1516.76,2269.16 C?.1@1686.76,2269.16 C?.2@4595.99,479 C?.2@4710.99,479 C?.2@4824.99,479 IC1.6 IC1.8 IC5.7 IC5.9 IC5.15 IC5.16 IC6.7 IC6.9 IC6.15 IC6.16 IC7.7 IC7.9 IC7.15 IC7.16 IC8.7 IC8.9 IC8.15 IC8.16 IC9.7 IC9.9 IC9.15 IC9.16 IC?.6 J3.2 J4.2 J5.2 J6.3 J7.3 J8.6 J9.3 R3.1 R4.2 R7.2 R8.2 R11.2 R12.2 U?.6@2331.22,-2262.2 U?.12@2331.22,-2380.31 U?.24@2331.22,-2616.53 U?.45@2421.77,-3100.78 U?.47@2461.14,-3100.78 U?.64@2795.79,-3100.78 U?.70@2913.9,-3100.78 U?.81@3130.43,-3100.78 U?.83@3169.8,-3100.78 U?.93@3358.78,-2931.49 U?.100@3358.78,-2793.69 U?.112@3358.78,-2557.47 U?.119@3358.78,-2419.68 U?.134@3248.54,-2073.22 U?.137@3189.49,-2073.22 U?.151@2913.9,-2073.22 U?.159@2756.42,-2073.22 U?.173@2480.83,-2073.22
IMU1_CS: IC?.12
IMU1_INT1: IC?.4
IMU1_INT2: IC?.9
IMU_SCK: IC?.13
IMU_SDI: IC?.14
IMU_SDO: IC?.1
M1_Current: IC5.6 R4.1 U?.58@1464.68,-3066.78
M1_OUT+: IC5.8 J1.1
M1_OUT-: IC5.10 J1.2
M1_PWM1: IC5.1 U?.87@5960.54,-2783.78
M1_PWM2: IC5.2 U?.88@5980.23,-2783.78
M1_Sleep: IC5.3 U?.86@5940.86,-2783.78
M2_Current: IC6.6 R7.1 U?.21@1118.22,-2523.47
M2_OUT+: IC6.8 J2.1
M2_OUT-: IC6.10 J2.2
M2_PWM1: IC6.1 U?.4@1118.22,-2188.83
M2_PWM2: IC6.2 U?.5@1118.22,-2208.51
M2_Sleep: IC6.3 U?.2@1118.22,-2149.46
M3_A: J6.5 U?.51@5251.88,-2783.78
M3_B: J6.6 U?.52@5271.57,-2783.78
M3_Current: IC7.6 R8.1 U?.53@5291.25,-2783.78
M3_OUT+: IC7.8 J6.1
M3_OUT-: IC7.10 J6.2
M3_PWM1: IC7.1 U?.55@5330.62,-2783.78
M3_PWM2: IC7.2 U?.56@5350.31,-2783.78
M3_Sleep: IC7.3 U?.57@5369.99,-2783.78
M4_A: J7.5 U?.95@6070.78,-2575.12
M4_B: J7.6 U?.96@6070.78,-2555.43
M4_Current: IC8.6 R11.1 U?.60@1504.05,-3066.78
M4_OUT+: IC8.8 J7.1
M4_OUT-: IC8.10 J7.2
M4_PWM1: IC8.1 U?.97@6070.78,-2535.75
M4_PWM2: IC8.2 U?.98@6070.78,-2516.06
M4_Sleep: IC8.3 U?.91@6070.78,-2653.86
M5_A: J9.5 U?.41@5043.22,-2634.17
M5_B: J9.6 U?.42@5043.22,-2653.86
M5_Current: IC9.6 R12.1 U?.37@5043.22,-2555.43
M5_OUT+: IC9.8 J9.1
M5_OUT-: IC9.10 J9.2
M5_PWM1: IC9.1 U?.43@5043.22,-2673.54
M5_PWM2: IC9.2 U?.46@5153.46,-2783.78
M5_Sleep: IC9.3 U?.35@5043.22,-2516.06
MCU_VCAP: C?.2@1743.85,2269.16 U?.80@548.75,-2890.78
NetC4_1: C4.1 IC1.5
NetC11_1: C11.1 IC5.14
NetC11_2: C11.2 IC5.13
NetC12_2: C12.2 IC5.12
NetC15_1: C15.1 IC6.14
NetC15_2: C15.2 IC6.13
NetC16_1: C16.1 IC7.14
NetC16_2: C16.2 IC7.13
NetC17_2: C17.2 IC6.12
NetC18_2: C18.2 IC7.12
NetC23_1: C23.1 IC8.14
NetC23_2: C23.2 IC8.13
NetC24_1: C24.1 IC9.14
NetC24_2: C24.2 IC9.13
NetC25_2: C25.2 IC8.12
NetC26_2: C26.2 IC9.12
NetIC5_4: IC5.4 R2.1
NetIC6_4: IC6.4 R5.1
NetIC7_4: IC7.4 R6.1
NetIC8_4: IC8.4 R9.1
NetIC9_4: IC9.4 R10.1
RX: J8.2
SCL: J8.4
SDA: J8.5
TX: J8.3
VREF: IC5.5 IC6.5 IC7.5 IC8.5 IC9.5 R1.1 R3.2
pads on no net: IC1.1 IC1.2 IC1.3 IC1.4 IC1.7 IC1.11 IC1.12 IC4.1 IC4.2 IC4.3 IC4.4 IC4.5 IC4.6 IC4.7 IC4.8 IC4.9 IC4.10 IC4.11 IC4.12 IC4.13 IC4.14 IC4.15 IC4.16 IC4.17 IC4.18 IC4.19 IC4.20 IC4.21 IC4.22 IC4.23 IC4.24 IC4.25 IC4.26 IC4.27 IC4.28 IC4.29 IC4.30 IC4.31 IC4.32 IC4.33 IC4.34 IC4.35 IC4.36 IC4.37 IC4.38 IC4.39 IC4.40 IC4.41 IC4.42 IC4.43 IC4.44 IC4.45 IC4.46 IC4.47 IC4.48 IC4.49 IC4.50 IC4.51 IC4.52 IC4.53 IC4.54 IC4.55 IC4.56 IC4.57 IC4.58 IC4.59 IC4.60 IC4.61 IC4.62 IC4.63 IC4.64 IC4.65 IC4.66 IC4.67 IC4.68 IC4.69 IC4.70 IC4.71 IC4.72 IC4.73 IC4.74 IC4.75 IC4.76 IC4.77 IC4.78 IC4.79 IC4.80 IC4.81 IC4.82 IC4.83 IC4.84 IC4.85 IC4.86 IC4.87 IC4.88 IC4.89 IC4.90 IC4.91 IC4.92 IC4.93 IC4.94 IC4.95 IC4.96 IC4.97 IC4.98 IC4.99 IC4.100 IC4.101 IC4.102 IC4.103 IC4.104 IC4.105 IC4.106 IC4.107 IC4.108 IC4.109 IC4.110 IC4.111 IC4.112 IC4.113 IC4.114 IC4.115 IC4.116 IC4.117 IC4.118 IC4.119 IC4.120 IC4.121 IC4.122 IC4.123 IC4.124 IC4.125 IC4.126 IC4.127 IC4.128 IC4.129 IC4.130 IC4.131 IC4.132 IC4.133 IC4.134 IC4.135 IC4.136 IC4.137 IC4.138 IC4.139 IC4.140 IC4.141 IC4.142 IC4.143 IC4.144 IC4.145 IC4.146 IC4.147 IC4.148 IC4.149 IC4.150 IC4.151 IC4.152 IC4.153 IC4.154 IC4.155 IC4.156 IC4.157 IC4.158 IC4.159 IC4.160 IC4.161 IC4.162 IC4.163 IC4.164 IC4.165 IC4.166 IC4.167 IC4.168 IC4.169 IC4.170 IC4.171 IC4.172 IC4.173 IC4.174 IC4.175 IC4.176 IC5.17 IC6.17 IC7.17 IC8.17 IC9.17 IC?.2 IC?.3 IC?.7 IC?.10 IC?.11 J8.7 J8.8 R?.1 R?.2 U?.1 U?.2@2331.22,-2183.46 U?.2@5043.22,-1866.46 U?.2@-230.78,-1973.46 U?.3 U?.4@2331.22,-2222.83 U?.4@5043.22,-1905.83 U?.4@-230.78,-2012.83 U?.5@2331.22,-2242.51 U?.5@5043.22,-1925.51 U?.5@-230.78,-2032.51 U?.6@1118.22,-2228.2 U?.6@5043.22,-1945.2 U?.6@-230.78,-2052.2 U?.7@1118.22,-2247.88 U?.7@2331.22,-2281.88 U?.7@5043.22,-1964.88 U?.8@1118.22,-2267.57 U?.8@2331.22,-2301.57 U?.8@5043.22,-1984.57 U?.9 U?.10 U?.11 U?.12@1118.22,-2346.31 U?.12@5043.22,-2063.31 U?.12@-230.78,-2170.31 U?.13@1118.22,-2365.99 U?.13@2331.22,-2399.99 U?.13@5043.22,-2082.99 U?.14 U?.15 U?.16 U?.17 U?.18 U?.19 U?.20 U?.21@2331.22,-2557.47 U?.21@5043.22,-2240.47 U?.21@-230.78,-2347.47 U?.22 U?.23 U?.24@1118.22,-2582.53 U?.24@5043.22,-2299.53 U?.24@-230.78,-2406.53 U?.25@1118.22,-2602.21 U?.25@2331.22,-2636.21 U?.25@5043.22,-2319.21 U?.26 U?.27 U?.28 U?.29 U?.30 U?.31 U?.32 U?.33 U?.34 U?.35@1118.22,-2799.06 U?.35@2331.22,-2833.06 U?.35@-230.78,-2623.06 U?.36 U?.37@1118.22,-2838.43 U?.37@2331.22,-2872.43 U?.37@-230.78,-2662.43 U?.38 U?.39 U?.40 U?.41@1118.22,-2917.17 U?.41@2331.22,-2951.17 U?.41@-230.78,-2741.17 U?.42@1118.22,-2936.86 U?.42@2331.22,-2970.86 U?.42@-230.78,-2760.86 U?.43@1118.22,-2956.54 U?.43@2331.22,-2990.54 U?.43@-230.78,-2780.54 U?.44@1118.22,-2976.23 U?.44@2331.22,-3010.23 U?.44@5043.22,-2693.23 U?.45@1208.77,-3066.78 U?.45@5133.77,-2783.78 U?.45@-140.23,-2890.78 U?.46@1228.46,-3066.78 U?.46@2441.46,-3100.78 U?.46@-120.54,-2890.78 U?.47@1248.14,-3066.78 U?.47@5173.14,-2783.78 U?.47@-100.86,-2890.78 U?.48@1267.83,-3066.78 U?.48@2480.83,-3100.78 U?.48@5192.83,-2783.78 U?.49 U?.50 U?.51@1326.88,-3066.78 U?.51@2539.88,-3100.78 U?.51@-22.12,-2890.78 U?.52@1346.57,-3066.78 U?.52@2559.57,-3100.78 U?.52@-2.43,-2890.78 U?.53@17.25,-2890.78 U?.53@1366.25,-3066.78 U?.53@2579.25,-3100.78 U?.54 U?.55@56.62,-2890.78 U?.55@1405.62,-3066.78 U?.55@2618.62,-3100.78 U?.56@76.31,-2890.78 U?.56@1425.31,-3066.78 U?.56@2638.31,-3100.78 U?.57@95.99,-2890.78 U?.57@1444.99,-3066.78 U?.57@2657.99,-3100.78 U?.58@115.68,-2890.78 U?.58@2677.68,-3100.78 U?.58@5389.68,-2783.78 U?.59 U?.60@155.05,-2890.78 U?.60@2717.05,-3100.78 U?.60@5429.05,-2783.78 U?.61 U?.62 U?.63 U?.64@233.79,-2890.78 U?.64@1582.79,-3066.78 U?.64@5507.79,-2783.78 U?.65@1602.47,-3066.78 U?.65@2815.47,-3100.78 U?.65@5527.47,-2783.78 U?.66 U?.67 U?.68 U?.69 U?.70@351.9,-2890.78 U?.70@1700.9,-3066.78 U?.70@5625.9,-2783.78 U?.71@1720.58,-3066.78 U?.71@2933.58,-3100.78 U?.71@5645.58,-2783.78 U?.72 U?.73 U?.74 U?.75 U?.76 U?.77 U?.78 U?.79 U?.80@1897.75,-3066.78 U?.80@3110.75,-3100.78 U?.80@5822.75,-2783.78 U?.81@568.43,-2890.78 U?.81@1917.43,-3066.78 U?.81@5842.43,-2783.78 U?.82 U?.83@607.8,-2890.78 U?.83@1956.8,-3066.78 U?.83@5881.8,-2783.78 U?.84@1976.49,-3066.78 U?.84@3189.49,-3100.78 U?.84@5901.49,-2783.78 U?.85 U?.86@666.86,-2890.78 U?.86@2015.86,-3066.78 U?.86@3228.86,-3100.78 U?.87@686.54,-2890.78 U?.87@2035.54,-3066.78 U?.87@3248.54,-3100.78 U?.88@706.23,-2890.78 U?.88@2055.23,-3066.78 U?.88@3268.23,-3100.78 U?.89 U?.90 U?.91@796.78,-2760.86 U?.91@2145.78,-2936.86 U?.91@3358.78,-2970.86 U?.92@2145.78,-2917.17 U?.92@3358.78,-2951.17 U?.92@6070.78,-2634.17 U?.93@796.78,-2721.49 U?.93@2145.78,-2897.49 U?.93@6070.78,-2614.49 U?.94 U?.95@796.78,-2682.12 U?.95@2145.78,-2858.12 U?.95@3358.78,-2892.12 U?.96@796.78,-2662.43 U?.96@2145.78,-2838.43 U?.96@3358.78,-2872.43 U?.97@796.78,-2642.75 U?.97@2145.78,-2818.75 U?.97@3358.78,-2852.75 U?.98@796.78,-2623.06 U?.98@2145.78,-2799.06 U?.98@3358.78,-2833.06 U?.99@2145.78,-2779.38 U?.99@3358.78,-2813.38 U?.99@6070.78,-2496.38 U?.100@796.78,-2583.69 U?.100@2145.78,-2759.69 U?.100@6070.78,-2476.69 U?.101 U?.102 U?.103 U?.104 U?.105 U?.106 U?.107 U?.108 U?.109 U?.110 U?.111 U?.112@796.78,-2347.47 U?.112@2145.78,-2523.47 U?.112@6070.78,-2240.47 U?.113@2145.78,-2503.79 U?.113@3358.78,-2537.79 U?.113@6070.78,-2220.79 U?.114 U?.115 U?.116 U?.117 U?.118 U?.119@796.78,-2209.68 U?.119@2145.78,-2385.68 U?.119@6070.78,-2102.68 U?.120 U?.121 U?.122 U?.123 U?.124 U?.125 U?.126@2145.78,-2247.88 U?.126@3358.78,-2281.88 U?.126@6070.78,-1964.88 U?.127 U?.128 U?.129 U?.130 U?.131 U?.132 U?.133 U?.134@686.54,-1863.22 U?.134@2035.54,-2039.22 U?.134@5960.54,-1756.22 U?.135 U?.136@1996.17,-2039.22 U?.136@3209.17,-2073.22 U?.136@5921.17,-1756.22 U?.137@627.49,-1863.22 U?.137@1976.49,-2039.22 U?.137@5901.49,-1756.22 U?.138 U?.139 U?.140 U?.141 U?.142 U?.143 U?.144 U?.145 U?.146 U?.147 U?.148 U?.149 U?.150 U?.151@351.9,-1863.22 U?.151@1700.9,-2039.22 U?.151@5625.9,-1756.22 U?.152@1681.21,-2039.22 U?.152@2894.21,-2073.22 U?.152@5606.21,-1756.22 U?.153 U?.154 U?.155 U?.156 U?.157 U?.158 U?.159@194.42,-1863.22 U?.159@1543.42,-2039.22 U?.159@5468.42,-1756.22 U?.160 U?.161 U?.162 U?.163 U?.164 U?.165 U?.166 U?.167 U?.168 U?.169 U?.170 U?.171 U?.172 U?.173@1267.83,-2039.22 U?.173@5192.83,-1756.22 U?.173@-81.17,-1863.22 U?.174 U?.175 U?.176

## Polygon pours and split planes (outlines as drawn)
GND on Top Layer "GND_L01_P000" (solid, pour order 0): 0,2600 0,0 4492.91,0 4500,7.09 4500,2600